# Altium PCB PCB.PcbDoc
Units mil, origin at the board's own origin, x right, y up, seen from the top; angles counter-clockwise.
Board outline 6000 x 4000 mil, 2 copper layers (Top Layer, Bottom Layer); 7 components, 20 nets, 54 pads, 4 vias.
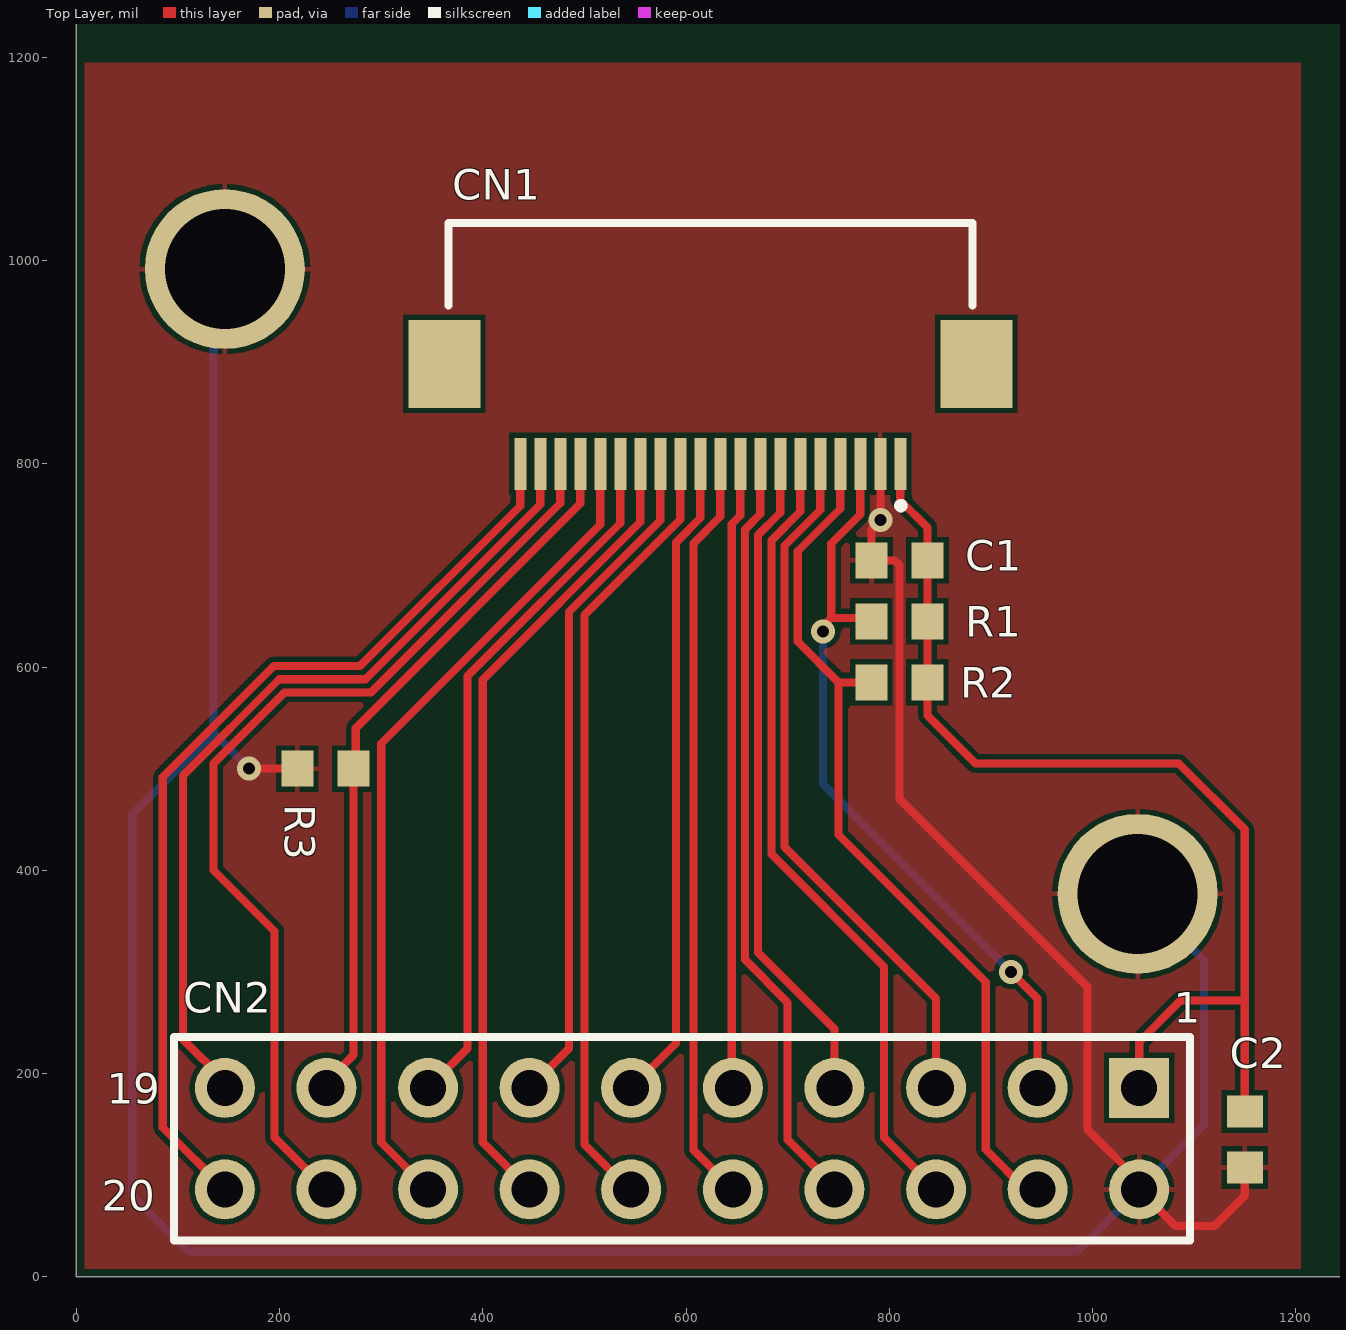
[diagram p0: Top Layer view]
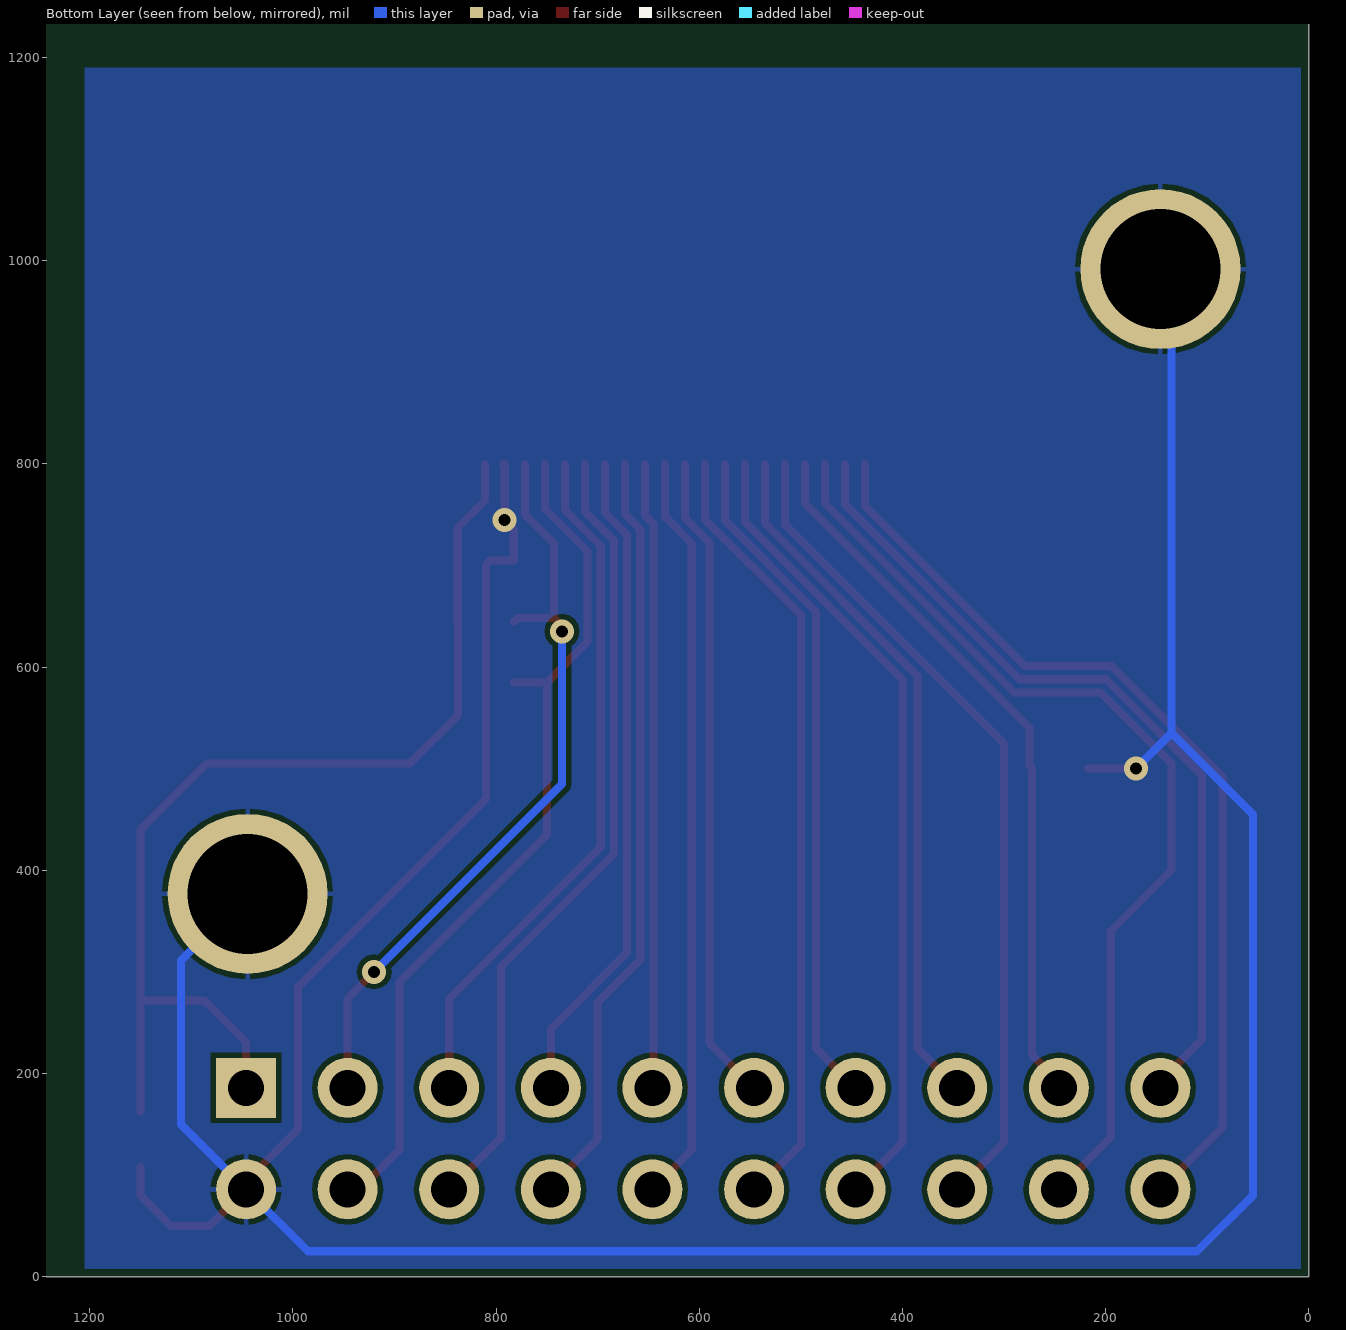
[diagram p1: Bottom Layer view, seen from below]

## Layer stack, top to bottom
Top Solder: solder mask 0.4, Solder Resist, Dk 3.5
Top Layer: signal copper 1.4
Dielectric 1: dielectric 12.6, FR-4, Dk 4.8
Bottom Layer: signal copper 1.4
Bottom Solder: solder mask 0.4, Solder Resist, Dk 3.5

## Board outline
0,0 6000,0 6000,4000 0,4000

## Design rules (kind name [scope] priority, off if disabled: settings)
BoardOutlineClearance [All] p1: gap=7.87 ignorepadtopadclearanceinfootprint=FALSE
Clearance [All] p1: gap=5 ignorepadtopadclearanceinfootprint=FALSE except(9.84: Arc-Hole Track-Hole SMDPad-Hole THPad-Hole Via-Hole Fill-Hole Poly-Hole Region-Hole Text-Hole)
ComponentClearance [All] p1: gap=5 collisioncheckmode=3 verticalgap=5 showdistances=TRUE
DiffPairsRouting [All] p1: maxlimit=10 minlimit=5 mostfreqgap=5 toplayer_minwidth=5 toplayer_maxwidth=1000 toplayer_prefwidth=5 bottomlayer_minwidth=5 bottomlayer_maxwidth=1000 bottomlayer_prefwidth=5 maxuncoupledlength=500
Height [All] p1: minheight=0 maxheight=71497.94 prefheight=500
HoleSize [All] p1: absolutevalues=TRUE maxlimit=248.03 minlimit=11.81 maxpercent=80.000 minpercent=20.000
HoleToHoleClearance [All] p1: gap=9.84 allowstackedmicrovias=FALSE
MinimumAnnularRing [All] p1: minimumring=3
MinimumSolderMaskSliver [All] p1: minsoldermaskwidth=0
PlaneClearance [All] p1: clearance=5
PlaneConnect PlaneConnectPowerPads [InPadClass('PowerPads')] p1: planeconnectstyle=Direct reliefexpansion=20 reliefentries=4 reliefconductorwidth=10 reliefairgap=10
PlaneConnect [All] p2: pad.planeconnectstyle=Relief pad.reliefexpansion=11.81 pad.reliefentries=4 pad.reliefconductorwidth=5 pad.reliefairgap=5 via.planeconnectstyle=Direct via.reliefexpansion=11.81 via.reliefentries=4 via.reliefconductorwidth=5 via.reliefairgap=5
PolygonConnect PolygonConnectPowerPads [All vs (InPadClass('PowerPads'))] p1: connectstyle=Direct reliefconductorwidth=10 reliefentries=4 polygonreliefangle="90 Angle" airgapwidth=10
PolygonConnect [All] p2: thpad.connectstyle=Relief thpad.reliefconductorwidth=5 thpad.reliefentries=4 thpad.polygonreliefangle="90 Angle" thpad.airgapwidth=5 smdpad.connectstyle=Relief smdpad.reliefconductorwidth=5 smdpad.reliefentries=4 smdpad.polygonreliefangle="90 Angle" smdpad.airgapwidth=5 via.connectstyle=Direct via.reliefconductorwidth=5 via.reliefentries=4 via.polygonreliefangle="90 Angle" via.airgapwidth=5
RoutingVias [All] p1: holewidth=11.81 width=23.62 viastyle="Through Hole" minholewidth=11.81 minwidth=23.62 maxholewidth=23.62 maxwidth=259.84
SilkToSilkClearance [All] p1: silktosilkclearance=0
SilkToSolderMaskClearance [IsPad] p1: minsilkscreentomaskgap=5 clearancetoexposedcopper=TRUE
SolderMaskExpansion [All] p1: expansion=2.95 istentingtop=FALSE
Width [All] p1: maxlimit=1000 minlimit=5 preferedwidth=5 minimp=50.000000 maximp=50.000000 favimp=50.000000
20 further rules are at their usual default settings.

## Classes and differential pairs
component class Camera: C1 C2 CN1 R1 R2 R3

## Components (designator, comment, footprint, x,y, rotation, side; value= is the part's Value field where it differs from the comment)
C1 "X5R" 1608[0603] 810.1,705 r180 top value=100nF
C2 "X5R" 1608[0603] 1150,135 r270 top value=100nF
CN1 "FH12-20S-0.5SH_55_" FH12-20S-0.5SH(55) 623.9,816.61 r0 top
CN2 "Header 10X2" HDR2X10 1046.06,185.83 r180 top
R1 "Res1" 1608[0603] 810,645 r180 top value=10k
R2 "Res1" 1608[0603] 810,585 r180 top value=10k
R3 "Res1" 1608[0603] 245,500 r180 top value=10k

## Footprints (in the part's own frame and the unit in brackets; to place one, negate y for a bottom-side part, rotate by r counter-clockwise, add the part's x,y. Pads: shape width x height; smd on the part's side, far side on the other; paste and mask are expansions set on the pad)
1608[0603] [mm] "Chip Capacitor, Body 1.6x0.8mm, IPC High Density"
  rect 0.8x0.9 smd: 1(-0.7,0) 2(0.7,0)
  body extent -0.87,-0.48 0.87,0.48, height 1.3
FH12-20S-0.5SH(55) [mm]
  rect 0.3x1.3 smd: 1(4.75,-0.422) 2(4.25,-0.422) 3(3.75,-0.422) 4(3.25,-0.422) 5(2.75,-0.422) 6(2.25,-0.422) 7(1.75,-0.422) 8(1.25,-0.422) 9(0.75,-0.422) 10(0.25,-0.422) 11(-0.25,-0.422) 12(-0.75,-0.422) 13(-1.25,-0.422) 14(-1.75,-0.422) 15(-2.25,-0.422) 16(-2.75,-0.422) 17(-3.25,-0.422) 18(-3.75,-0.422) 19(-4.25,-0.422) 20(-4.75,-0.422)
  rect 1.8x2.2 smd: 21(-6.65,2.078) 22(6.65,2.078)
  silkscreen extent -6.55,-1.53 6.55,5.6
HDR2X10 [mm] "Connector; Header; 10x2 Position"
  rect 1.5x1.5 hole 0.9: 1(0,0)
  round 1.5 hole 0.9: 2(0,2.54) 3(2.54,0) 4(2.54,2.54) 5(5.08,0) 6(5.08,2.54) 7(7.62,0) 8(7.62,2.54) 9(10.16,0) 10(10.16,2.54) 11(12.7,0) 12(12.7,2.54) 13(15.24,0) 14(15.24,2.54) 15(17.78,0) 16(17.78,2.54) 17(20.32,0) 18(20.32,2.54) 19(22.86,0) 20(22.86,2.54)
  silkscreen extent -1.27,-1.27 24.13,3.81

## Part data
C1 C2: library part Cap, "Capacitor", LatestRevisionDate=17-Jul-2002, LatestRevisionNote="Re-released for DXP Platform.", PackageDescription="Radial Cap, Thru-Hole; 2 Leads; 0.3 in Pin Spacing", PackageReference=RAD-0.3, Published=8-Jun-2000, Publisher="Altium Limited"
CN1: "Connector", Manufacturer_Name=Hirose, Manufacturer_Part_Number=FH12-20S-0.5SH(55), Mouser Part Number=798-FH12-20S-0.5SH55, Datasheet Link=https://componentsearchengine.com/Datasheets/2/FH12-20S-0.5SH(55).pdf, Mouser Price/Stock=https://www.mouser.co.uk/ProductDetail/Hirose-Connector/FH12-20S-0.5SH55?qs=Ux3WWAnHpjBAoMH%252Bjl1N9Q%3D%3D
CN2: "Header, 10-Pin, Dual row", LatestRevisionDate=17-Jul-2002, LatestRevisionNote="Re-released for DXP Platform.", Publisher="Altium Limited"
R1 R2 R3: "Resistor", LatestRevisionDate=17-Jul-2002, LatestRevisionNote="Re-released for DXP Platform.", PackageDescription="Axial Device, Thru-Hole; 2 Leads; 0.3 in Pin Spacing", PackageReference=AXIAL-0.3, Published=8-Jun-2000, Publisher="Altium Limited"

## Free pads (board coordinates)
  round 157.48 hole 118.11: 3(146.06,991.73) 3(1044.49,376.77)

## Via types
v1: diameter 23.62, hole 11.81, Top Layer to Bottom Layer, 4 vias

## Nets (pads, with @x,y where several pads share a name; then routed paths per layer and width w, separated by ;. In a path a pad name is that pad's centre, name@x,y a point inside that pad or via, vN(x,y) a via of type N, cw(c..) or ccw(c..) an arc to the next point about the centre after c; other vN are vias at no path point)
DOUT0: CN1.20 CN2.20 | length 935
  Top Layer w8: CN2.20 85,146.89 85,491.77 194.23,601 279.23,601 436.89,758.66 CN1.20
DOUT1: CN1.19 CN2.19 | length 826.6
  Top Layer w8: CN2.19 146.06,192.43 105,233.49 105,493.38 199.62,588 284.62,588 456.57,759.96 CN1.19
DOUT2: CN1.16 CN2.16 | length 822.6
  Top Layer w8: CN2.16 300,131.89 300,524.62 515.63,740.25 CN1.16
DOUT3: CN1.15 CN2.15 | length 692.6
  Top Layer w8: CN2.15 385,224.76 385,591.23 535.31,741.55 CN1.15
DOUT4: CN1.14 CN2.14 | length 797.5
  Top Layer w8: CN2.14 400,131.89 400,587.85 555,742.85 CN1.14
DOUT5: CN1.13 CN2.13 | length 667.5
  Top Layer w8: CN2.13 485,224.76 485,654.46 574.68,744.15 CN1.13
DOUT6: CN1.12 CN2.12 | length 773.4
  Top Layer w8: CN2.12 544.17,85.83 500,130 500,651.08 594.37,745.45 CN1.12
DOUT7: CN1.11 CN2.11 | length 642.3
  Top Layer w8: CN2.11 590,229.76 590,722.69 614.06,746.75 CN1.11
DOUT8: CN1.10 CN2.10 | length 741.1
  Top Layer w8: CN1.10 633.74,748.05 607.37,721.68 607.37,124.52 CN2.10
DOUT9: CN1.9 CN2.9 | length 618.1
  Top Layer w8: CN2.9 645,186.89 645,740.92 653.43,749.35 CN1.9
GND: C1.2 C2.2 CN1.2 CN2.2 pad.3 R3.2 | length 3431.3
  Top Layer w8: v1(170,500) R3.2 ; CN1.2 792.91,800 791.44,798.54 v1(791.44,744.53) 782.54,735.63 C1.2 805.31,705 810,700.31 810,470 995,285 995,145 1046.06,93.94 CN2.2 1081.89,50 1120,50 1150,80 C2.2
  Bottom Layer w8: pad.3@146.06,991.73 135,980.67 135,535 ; v1(170,500) 135,535 ; pad.3@1044.49,376.77 1110,311.26 1110,149.76 CN2.2 985.24,25 110,25 55,80 55,455 135,535
HREF: CN1.6 CN2.6 | length 801.2
  Top Layer w8: CN1.6 712.48,753.25 684,724.77 684,416 795,305 795,136.89 CN2.6
  Bottom Layer w8: CN2.6 CN2.6@846.06,93.94
PCLK: CN1.7 CN2.7 | length 654.3
  Top Layer w8: CN1.7 692.8,751.95 671,730.15 671,319 746.06,243.94 CN2.7
PWDN: CN1.17 CN2.17 R3.1 | length 717.7
  Top Layer w8: CN2.17 246.06,191.56 272.56,218.06 R3.1 275,502.44 275,540 495.94,760.94 CN1.17
RSV: CN1.18 CN2.18 | length 951.3
  Top Layer w8: CN2.18 195,136.89 195,340 135,400 135,505 205,575 290,575 476.26,761.26 CN1.18
SCL: CN1.3 CN2.3 R1.2 | length 757.6
  Top Layer w8: v1(735,635.24) 735,640.48 742.99,648.47 ; CN1.3 771.54,750.08 742.99,721.53 742.99,648.47 ; R1.2 778.97,648.47 742.99,648.47 ; v1(920,300) 946.06,273.94 CN2.3
  Bottom Layer w8: v1(735,635.24) 735,485 v1(920,300)
SDATA: CN1.4 CN2.4 R2.2 | length 876.8
  Top Layer w8: CN1.4 751.85,755.85 710,714 710,625 750,585 ; R2.2 750,585 ; CN2.4 934.17,85.83 895,125 895,290 750,435 750,585
  Bottom Layer w8: CN2.4 CN2.4@946.06,93.94
VCC: C1.1 C2.1 CN1.1 CN2.1 R1.1 R2.1 | length 1061.2
  Top Layer w8: CN1.1 810.91,764.09 837.66,737.34 C1.1 837.66,645.1 R1.1 R2.1 837.56,552.44 885,505 1085,505 1150,440 1150,271.87 ; CN2.1 1046.06,231.06 1086.87,271.87 1150,271.87 ; C2.1 1150,271.87
VSYNC: CN1.5 CN2.5 | length 700.8
  Top Layer w8: CN1.5 732.17,754.55 697,719.38 697,423 846.06,273.94 CN2.5
  Bottom Layer w8: CN2.5@838.75,193.14 CN2.5
XCLK: CN1.8 CN2.8 | length 756.9
  Top Layer w8: CN1.8 673.11,750.65 658,735.54 658,312 700,270 700,135 746.06,88.94 CN2.8
pads on no net: CN1.21 CN1.22

## Polygon pours and split planes (outlines as drawn)
GND on Bottom Layer "GND_L02_P000" (solid, remove dead copper, pour order 0): 0,0 1205,0 1205,1190 0,1190
GND on Top Layer "GND_L01_P001" (solid, remove dead copper, pour order 1): 0,0 1205,0 1205,1195 0,1195

## Silkscreen, mask and mechanical layers (free items; w line width, h text height)
Mechanical 1:
  lines w10: 0,0 0,1192.13 1205,1192.13 1205,0 0,0

## Text inside footprints (layer, text, board x,y; h text height)
CN2: Top Overlay "1" at 1080,250 h30; Top Overlay "19" at 30,170 h30; Top Overlay "20" at 25,65 h30